# EAGLE board pic_can_bridge (EAGLE 4.15)
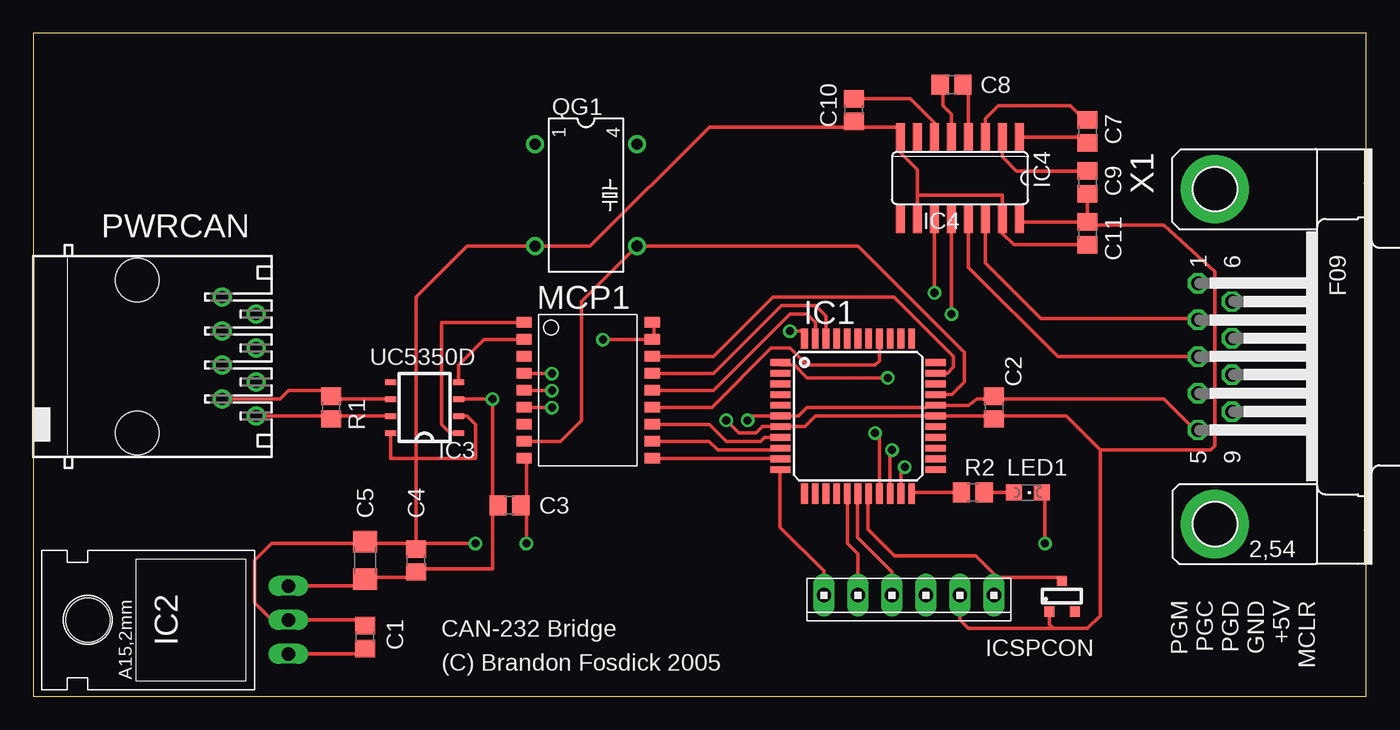
[diagram p0: board, top side]
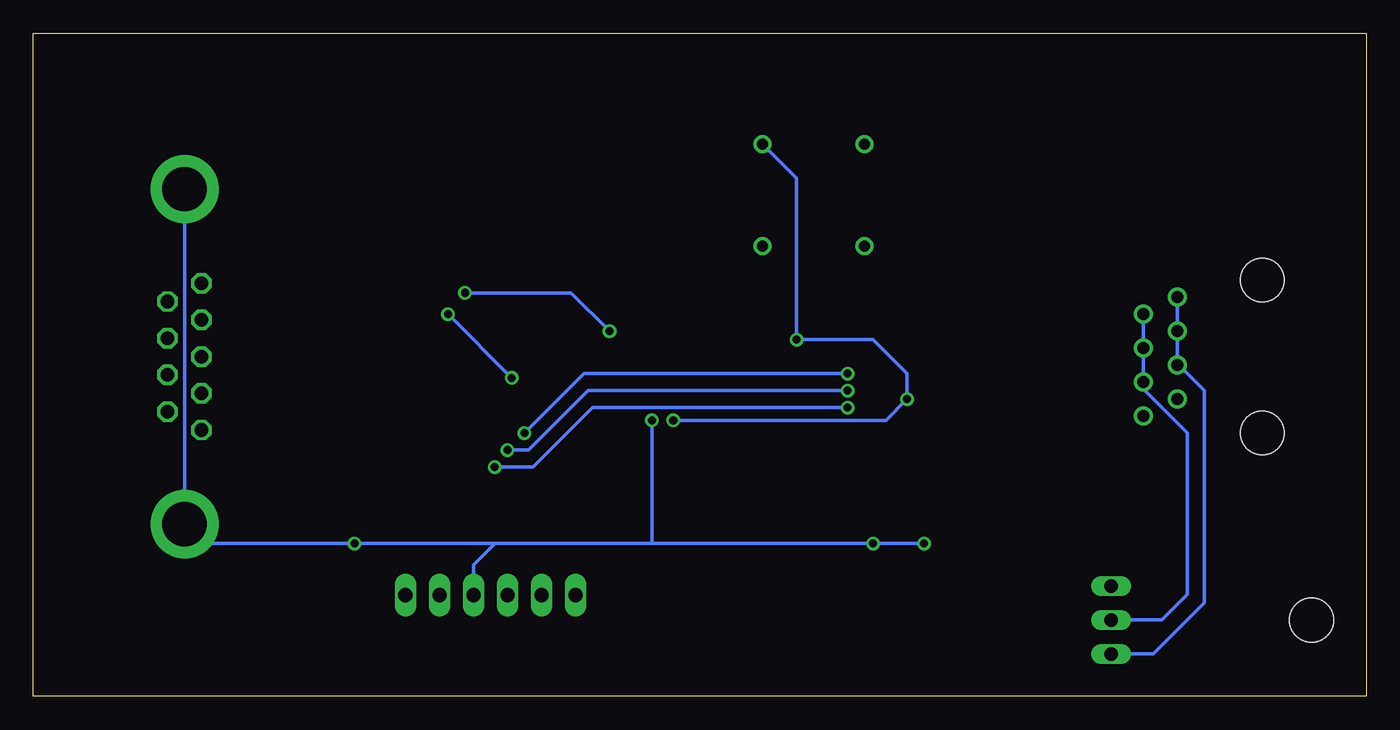
[diagram p1: board, bottom side, seen from below]

Size 99.55 x 49.55 mm. Coordinates in mm from the lower left corner, seen from the top.
Outline: 0,0 99.55,0 99.55,49.55 0,49.55 0,0
Copper layers (1*16): Top 0.035mm / dielectric 1.5mm / Bottom 0.035mm
Design rules "default": minimum track width 7mil, minimum drill 15mil, track to track 8mil, track to pad 8mil, pad to pad 8mil, via to via 8mil, smd to smd 8mil, copper to edge 40mil, drill to drill 20mil, minimum pad ring 10mil, minimum via ring 8mil, stop-mask expansion 0mil, vias tented up to drill 0mil, thermal gap 10mil

## Footprints (pad centres in the part's own frame; a part is rotated, then mirrored left to right if it is on the bottom)
C0805 = smd 1.3 x 1.5: 1 -0.85,0; 2 0.85,0
C1206 = smd 1.6 x 1.8: 1 -1.4,0; 2 1.4,0
TQFP44 = smd 1.5 x 0.5: 1 -5.8,4; 2 -5.8,3.2; 3 -5.8,2.4; 4 -5.8,1.6; 5 -5.8,0.8; 6 -5.8,0; 7 -5.8,-0.8; 8 -5.8,-1.6; 9 -5.8,-2.4; 10 -5.8,-3.2; 11 -5.8,-4; 23 5.8,-4; 24 5.8,-3.2; 25 5.8,-2.4; 26 5.8,-1.6; 27 5.8,-0.8; 28 5.8,0; 29 5.8,0.8; 30 5.8,1.6; 31 5.8,2.4; 32 5.8,3.2; 33 5.8,4 | smd 0.5 x 1.5: 12 -4,-5.8; 13 -3.2,-5.8; 14 -2.4,-5.8; 15 -1.6,-5.8; 16 -0.8,-5.8; 17 0,-5.8; 18 0.8,-5.8; 19 1.6,-5.8; 20 2.4,-5.8; 21 3.2,-5.8; 22 4,-5.8; 34 4,5.8; 35 3.2,5.8; 36 2.4,5.8; 37 1.6,5.8; 38 0.8,5.8; 39 0,5.8; 40 -0.8,5.8; 41 -1.6,5.8; 42 -2.4,5.8; 43 -3.2,5.8; 44 -4,5.8
78XXL = drill 1 long: GND 0,-3.81; IN -2.54,-3.81; OUT 2.54,-3.81 | hole 3.302: 0,11.176
SOIC8 = smd 0.813 x 0.406: CANH 2.54,1.27; CANL 2.54,0; GND -2.54,1.27; RS 2.54,2.54; RXD -2.54,-1.27; TXN -2.54,2.54; VCC -2.54,0; VREF 2.54,-1.27
SO16 = smd 0.66 x 2.032: 1 -4.445,-3.073; 2 -3.175,-3.073; 3 -1.905,-3.073; 4 -0.635,-3.073; 5 0.635,-3.073; 6 1.905,-3.073; 7 3.175,-3.073; 8 4.445,-3.073; 9 4.445,3.073; 10 3.175,3.073; 11 1.905,3.073; 12 0.635,3.073; 13 -0.635,3.073; 14 -1.905,3.073; 15 -3.175,3.073; 16 -4.445,3.073
10X06MTA = drill 1.067 long: 1 6.35,0; 2 3.81,0; 3 1.27,0; 4 -1.27,0; 5 -3.81,0; 6 -6.35,0
CHIPLED_0805 = smd 1.2 x 1.2: A 0,-1.05; C 0,1.05
SO-18W = smd 0.762 x 1.143: 1 -5.08,-4.788; 2 -3.81,-4.788; 3 -2.54,-4.788; 4 -1.27,-4.788; 5 0,-4.788; 6 1.27,-4.788; 7 2.54,-4.788; 8 3.81,-4.788; 9 5.08,-4.788; 10 5.08,4.788; 11 3.81,4.788; 12 2.54,4.788; 13 1.27,4.788; 14 0,4.788; 15 -1.27,4.788; 16 -2.54,4.788; 17 -3.81,4.788; 18 -5.08,4.788
555166-1 = drill 0.889 round: 1 -4.445,5.207; 2 -3.175,7.747; 3 -1.905,5.207; 4 -0.635,7.747; 5 0.635,5.207; 6 1.905,7.747; 7 3.175,5.207; 8 4.445,7.747 | hole 3.251: -5.715,-1.143; 5.715,-1.143
DIL08-4 = drill 0.813 round: 1 -3.81,-3.81; 2 3.81,-3.81; 3 3.81,3.81; 4 -3.81,3.81
R0805 = smd 1.3 x 1.5: 1 -0.85,0; 2 0.85,0
SOT-23 = smd 0.76 x 0.76: 1 -0.95,0; 2 0.95,0; 3 0,2.29
F09HP = drill 1.016 octagon: 1 -5.486,-1.27; 2 -2.743,-1.27; 3 0,-1.27; 4 2.743,-1.27; 5 5.486,-1.27; 6 -4.115,1.27; 7 -1.372,1.27; 8 1.372,1.27; 9 4.115,1.27 | drill 3.302 pad 5.08 round: G1 -12.522,0; G2 12.522,0

## Placement (x,y rotation side)
C1  1uF  [C0805]  24.77,4.45 90 top
C2  0.1uF  [C0805]  71.75,21.59 90 top
C3  0.1uF  [C0805]  35.56,14.29 0 top
C4  1uF  [C0805]  28.57,10.16 90 top
C5  10uF  [C1206]  24.77,10.16 90 top
C7  1uF  [C0805]  78.74,42.23 90 top
C8  1uF  [C0805]  68.58,45.72 180 top
C9  1uF  [C0805]  78.74,38.42 270 top
C10  1uF  [C0805]  61.28,43.81 90 top
C11  1uF  [C0805]  78.74,34.61 270 top
IC1  PIC16F877PT  [TQFP44]  61.59,20.95 0 top
IC2  [78XXL]  15.24,5.71 90 top
IC3  UC5350D  [SOIC8]  29.21,22.23 180 top
IC4  MAX232CSE  [SO16]  69.22,38.73 180 top
ICSPCON  [10X06MTA]  65.41,7.57 180 top
LED1  [CHIPLED_0805]  74.3,15.24 270 top
MCP1  MCP2510-I/SO  [SO-18W]  41.43,22.88 270 top
PWRCAN  [555166-1]  8.89,25.4 270 top
QG1  [DIL08-4]  41.27,37.47 270 top
R1  60  [R0805]  22.23,21.59 270 top
R2  120  [R0805]  70.17,15.24 0 top
U$2  BAV70_  [SOT-23]  76.83,6.35 0 top
X1  [F09HP]  88.27,25.4 270 top

## Library data of the parts
C1-C5 C7-C11 R1 R2 = rcl
IC1 MCP1 = microchip
IC2 = v-reg
IC3 IC4 U$2 = house
ICSPCON PWRCAN = con-amp
LED1 = led
QG1 = crystal
X1 = con-subd

## Nets
+5V: C2.1 C3.1 C4.1 C5.1 C9.2 C11.1 IC1.7 IC1.28 IC2.OUT IC3.VCC IC4.16 ICSPCON.5 MCP1.17 MCP1.18 QG1.4 U$2.1
+12V: C1.1 IC2.IN PWRCAN.1 PWRCAN.3 PWRCAN.5
A4: IC1.23
B4: IC1.14
B5: IC1.15
C1: IC1.35
C2: IC1.36
CAN_INT: IC1.8 MCP1.12
CANH: IC3.CANH PWRCAN.8 R1.2
CANL: IC3.CANL PWRCAN.7 R1.1
CLK: IC1.30 MCP1.8 QG1.3
CS: IC1.32 MCP1.16
D0: IC1.38
D1: IC1.39
D2: IC1.40
D3: IC1.41
D4: IC1.2
D5: IC1.3
D6: IC1.4
D7: IC1.5
E0: IC1.25
E1: IC1.26
E2: IC1.27
GND: C1.2 C2.2 C3.2 C4.2 C5.2 C10.1 C11.2 IC1.6 IC1.29 IC2.GND IC3.GND IC3.RS IC4.8 IC4.10 IC4.15 ICSPCON.4 LED1.C MCP1.9 PWRCAN.2 PWRCAN.4 PWRCAN.6 QG1.2 X1.5 X1.G1 X1.G2
MCLR: IC1.18 ICSPCON.6 U$2.3
MISO: IC1.42 MCP1.15
MOSI: IC1.43 MCP1.14
N$1: LED1.A R2.2
N$2: C9.1 IC4.2
N$3: IC1.22 R2.1
N$9: C10.2 IC4.6
N$13: C7.2 IC4.3
N$14: C8.1 IC4.4
N$15: C8.2 IC4.5
N$16: C7.1 IC4.1
PGC: IC1.16 ICSPCON.2
PGD: IC1.17 ICSPCON.3
PGM: IC1.11 ICSPCON.1
R1IN: IC4.13 X1.3
RX: IC1.1 IC4.12
RX0BF: IC1.9 MCP1.11
RX1BF: IC1.10 MCP1.10
RXCAN: IC3.RXD MCP1.2
SCK: IC1.37 MCP1.13
T1OUT: IC4.14 X1.2
TX: IC1.44 IC4.11
TX0RTS: IC1.19 MCP1.4
TX1RTS: IC1.20 MCP1.5
TX2RTS: IC1.21 MCP1.6
TXCAN: IC3.TXN MCP1.1

## Tracks (layer width: path | path; a pad name or v marks a point on that pad's centre or on a via)
+5V  (via drill 0.6)
  Top 0.254: IC2.OUT 24.77,8.26 C5.1 24.77,8.89 28.57,8.89 C4.1 29.21,9.53 34.29,9.53 34.29,13.97 34.61,14.29 | 73.66,35.56 73.66,34.92 | 71.12,20.95 IC1.28 58.42,20.95 57.63,20.17 56.52,20.17 IC1.7 55.8,20.09 55.88,20.16 56.03,20.16 56.04,20.16 54.45,20.16 53.98,19.68 52.7,19.68 v51.75,20.64 | 71.12,20.95 C2.1 | IC3.VCC v34.29,22.23 34.29,14.61 34.61,14.29 | 46.35,26.67 46.35,27.94 MCP1.18 | 46.35,26.67 MCP1.17 45.72,26.67 | 73.66,35.56 IC4.16 | C11.1 73.76,35.46 73.66,35.56 | 78.74,37.78 C9.2 C11.1 | 71.12,20.95 77.15,20.95 79.69,18.41 | C11.1 78.74,35.24 84.45,35.24 88.27,31.75 88.27,18.73 87.95,18.41 79.69,18.41 | v42.55,26.67 46.35,26.67 | 34.61,14.29 C3.1 | U$2.1 75.81,6.28 U$2.1 75.88,5.4 76.2,5.08 | 69.22,7.62 ICSPCON.5 69.22,5.71 69.85,5.08 76.2,5.08 | 76.2,5.08 78.74,5.08 79.69,6.03 79.69,18.41
  Bottom 0.254: QG1.4 42.55,38.73 v42.55,26.67 36.83,26.67 34.29,24.13 v34.29,22.23 35.88,20.64 v51.75,20.64
+12V
  Top 0.254: C1.1 24.77,3.17 IC2.IN
  Bottom 0.254: IC2.IN 15.88,3.17 12.06,6.99 12.06,22.86 13.97,24.77 PWRCAN.5 14.1,27.18 13.97,27.3 PWRCAN.3 14.1,29.72 13.97,29.84 PWRCAN.1
CAN_INT
  Top 0.254: MCP1.12 46.24,20.32 50.48,20.32 51.75,19.05 54.29,19.05 54.61,19.37 55.81,19.37 | 55.81,19.37 55.88,19.37 | 55.81,19.37 IC1.8
CANH
  Top 0.254: PWRCAN.8 22.23,20.95 | 22.23,20.95 R1.2 | 22.23,20.95 IC3.CANH
CANL
  Top 0.254: PWRCAN.7 14.55,22.28 14.61,22.23 18.41,22.23 19.05,22.86 21.59,22.86 R1.1 22.48,22.23 IC3.CANL
CLK
  Top 0.254: MCP1.8 36.83,19.05 39.37,19.05 40.96,20.64 40.96,29.53 QG1.3 61.59,33.66 69.53,25.72 69.53,23.5 68.59,22.55 IC1.30
CS
  Top 0.254: MCP1.16 46.35,25.4 50.8,25.4 55.24,29.84 64.29,29.84 68.74,25.4 68.74,24.61 68.26,24.13 67.31,24.13 67.33,24.16 IC1.32
GND  (via drill 0.6)
  Top 0.254: C1.2 24.77,5.71 IC2.GND 17.78,5.71 16.51,6.99 16.51,10.16 17.78,11.43 24.77,11.43 | 24.77,11.43 C5.2 | 28.57,11.43 C4.2 | 24.77,11.43 28.57,11.43 | IC3.RS 26.67,17.78 28.57,17.78 | 66.04,37.47 66.04,39.37 64.77,40.64 IC4.8 64.77,42.55 61.28,42.55 | 66.04,37.47 IC4.10 | 66.04,37.47 72.39,37.47 IC4.15 72.39,34.61 73.24,33.76 C11.2 | 55.88,20.95 IC1.6 | 55.88,20.95 57.15,20.95 57.78,21.59 66.67,21.59 IC1.29 67.94,21.74 69.85,21.74 70.48,22.23 71.12,22.23 C2.2 72.39,22.23 84.45,22.23 86.36,20.32 X1.5 | 61.28,42.55 50.48,42.55 41.59,33.66 QG1.2 32.38,33.66 28.57,29.84 28.57,17.78 | IC3.GND 32.38,20.95 33.02,20.32 33.02,17.78 28.57,17.78 | 28.57,11.43 v33.02,11.43 | 61.28,42.55 C10.1 | 28.57,11.43 28.57,17.78 | v36.83,11.43 36.83,14.29 C3.2 36.83,14.71 36.83,17.78 36.67,17.78 MCP1.9 | 55.88,20.95 53.66,20.95 v53.34,20.64 | LED1.C 75.25,15.24 75.56,14.92 v75.56,11.43
  Bottom 0.254: X1.5 87.63,19.68 | PWRCAN.2 16.51,28.57 16.64,28.45 PWRCAN.4 16.51,26.04 16.64,25.91 PWRCAN.6 16.51,23.5 16.51,22.86 13.34,19.68 13.34,7.62 15.24,5.71 IC2.GND | v33.02,11.43 v36.83,11.43 53.34,11.43 | 53.34,11.43 65.08,11.43 | 65.08,11.43 v75.56,11.43 86.68,11.43 88.27,13.02 | 88.27,13.02 X1.G1 88.27,38.1 | ICSPCON.4 66.67,9.83 65.08,11.43 | 53.34,11.43 v53.34,20.64 | 88.27,12.7 X1.G2 88.27,13.02
MCLR
  Top 0.254: 62.38,15.39 IC1.18 62.33,15.09 62.33,12.5 64.31,10.52 70.41,10.52 71.75,9.17 71.75,8.89 | 71.75,7.49 ICSPCON.6 | 71.75,8.57 71.75,7.49 | 71.75,7.49 71.78,7.47 | 71.75,8.57 71.76,8.56 | 71.75,8.89 71.75,8.57 | 71.75,8.89 76.52,8.89 76.83,8.57 U$2.3
MISO
  Top 0.254: MCP1.15 46.35,24.13 50.8,24.13 55.88,29.21 58.42,29.21 59.21,28.42 59.21,27.15 IC1.42
MOSI
  Top 0.254: MCP1.14 46.35,22.86 50.8,22.86 56.52,28.57 57.78,28.57 58.42,27.94 58.42,27.3 IC1.43
N$1
  Top 0.254: LED1.A R2.2
N$2
  Top 0.254: C9.1 73.44,39.27 72.39,40.32 IC4.2
N$3
  Top 0.254: IC1.22 65.64,15.15 65.72,15.24 R2.1
N$9
  Top 0.254: C10.2 65.51,44.66 67.31,42.86 IC4.6
N$13
  Top 0.254: IC4.3 71.12,43.18 72.07,44.13 77.47,44.13 78.74,42.86 C7.2
N$14
  Top 0.254: C8.1 69.85,45.09 IC4.4
N$15
  Top 0.254: C8.2 67.94,45.09 67.94,44.13 68.58,43.5 IC4.5
N$16
  Top 0.254: C7.1 78.74,41.27 78.21,41.81 IC4.1
PGC
  Top 0.254: ICSPCON.2 61.59,10.64 60.81,11.43 60.81,15.09
  Top 0.406: 60.81,15.09 60.8,15.1 IC1.16
PGD
  Top 0.254: 61.59,15.24 IC1.17 61.59,14.96 61.57,14.94 61.57,11.89 64.14,9.32 ICSPCON.3
PGM
  Top 0.254: ICSPCON.1 59.05,9.37 55.78,12.65 55.78,16.92 55.8,16.93 IC1.11
  Top 0.406: IC1.11 55.78,16.94
R1IN
  Top 0.254: IC4.13 69.85,32.07 76.52,25.4 X1.3
RX  (via drill 0.6, 0.61)
  Top 0.254: v68.58,28.57 IC4.12 | v63.82,23.81 57.78,23.81 56.83,24.77 55.88,24.77 55.8,24.85 IC1.1
  Bottom 0.254: v63.82,23.81 v68.58,28.57
RX0BF
  Top 0.254: MCP1.11 50.46,19.07 51.12,18.41 55.88,18.41 55.8,18.5 IC1.9
RX1BF
  Top 0.254: IC1.10 55.85,17.75 55.88,17.78 55.86,17.8 MCP1.10
RXCAN
  Top 0.254: MCP1.2 36.2,26.67 33.66,26.67 31.75,24.77 IC3.RXD
SCK
  Top 0.254: IC1.37 63.2,26.36 63.18,26.35 63.18,25.08 62.87,24.77 57.78,24.77 56.52,26.04 55.09,26.04 50.67,21.61 MCP1.13
T1OUT
  Top 0.254: IC4.14 71.12,32.38 75.25,28.26 86.84,28.26 87,28.1 X1.2
TX  (via drill 0.61)
  Top 0.254: v56.52,27.3 57.47,27.3 57.47,26.99 57.59,26.86 IC1.44 | v67.31,30.16 IC4.11
  Bottom 0.254: v56.52,27.3 59.37,30.16 v67.31,30.16
TX0RTS  (via drill 0.6)
  Top 0.254: MCP1.4 v38.73,24.13 | IC1.19 63.2,19.36 v62.87,19.68
  Bottom 0.254: v38.73,24.13 58.42,24.13 v62.87,19.68
TX1RTS  (via drill 0.6)
  Top 0.254: MCP1.5 v38.73,22.86 | IC1.20 63.99,18.24 v64.14,18.41
  Bottom 0.254: v38.73,22.86 58.1,22.86 62.55,18.41 v64.14,18.41
TX2RTS  (via drill 0.6)
  Top 0.254: MCP1.6 v38.73,21.59 | IC1.21 64.8,17.12 v65.09,17.14
  Bottom 0.254: v38.73,21.59 57.78,21.59 62.23,17.14 v65.09,17.14
TXCAN
  Top 0.254: MCP1.1 36.2,27.94 30.48,27.94 30.48,20.32 31.11,19.68 IC3.TXN

## Text on the board
tNames: PGM | PGC | PGD | GND | +5V | MCLR | CAN-232 Bridge | (C) Brandon Fosdick 2005
tStop: 29 tStop
bStop: 30 bStop